# EAGLE board ABCD1110 (EAGLE 9.7.0)

Size 141.43 x 79.62 mm. Coordinates in mm from the lower left corner, seen from the top.
Outline: 0,0 141.43,0 141.43,79.62 0,79.62 0,0
Copper layers (1*16): Top 0.035mm / dielectric 1.5mm / Bottom 0.035mm
Design rules "default": minimum track width 6mil, minimum drill 0.35mm, track to track 6mil, track to pad 6mil, pad to pad 6mil, via to via 6mil, smd to smd 6mil, copper to edge 40mil, drill to drill 6mil, minimum pad ring 10mil, minimum via ring 8mil, stop-mask expansion 4mil, vias tented up to drill 0mil, thermal gap 10mil

## Footprints (pad centres in the part's own frame; a part is rotated, then mirrored left to right if it is on the bottom)
LEDRD254W60D565H860B_G = drill 0.981 pad 1.581: 1 -1.27,0; 2 1.27,0
BATTERY-GENERIC = drill 1.118 pad 3.15 octagon: + 2.54,0; - -2.54,0
RESAD1016W63L850D250B = drill 0.83 pad 1.43: 1 -5.08,0; 2 5.08,0
78B06ST = drill 0.8: 1 -6.35,-3.81; 2 -3.81,-3.81; 3 -1.27,-3.81; 4 1.27,-3.81; 5 3.81,-3.81; 6 6.35,-3.81; 7 6.35,3.81; 8 3.81,3.81; 9 1.27,3.81; 10 -1.27,3.81; 11 -3.81,3.81; 12 -6.35,3.81
DIP762W53P254L1969H508Q14B = drill 0.743 pad 1.343: 1 -3.81,7.62; 2 -3.81,5.08; 3 -3.81,2.54; 4 -3.81,0; 5 -3.81,-2.54; 6 -3.81,-5.08; 7 -3.81,-7.62; 8 3.81,-7.62; 9 3.81,-5.08; 10 3.81,-2.54; 11 3.81,0; 12 3.81,2.54; 13 3.81,5.08; 14 3.81,7.62

## Placement (x,y rotation side)
D1  GREEN  [LEDRD254W60D565H860B_G]  126.11,71.71 180 top
P1  BATTERYGENERIC  [BATTERY-GENERIC]  16.52,8.26 180 top
R1  1k  [RESAD1016W63L850D250B]  132.46,66.63 0 top
SW1  SPST-678B06ST  [78B06ST]  11.81,57.74 0 top
U1  74HC04_PDIP  [DIP762W53P254L1969H508Q14B]  35.94,57.74 90 top
U2  74HC11_PDIP  [DIP762W53P254L1969H508Q14B]  58.8,57.74 90 top
U3  74HC08_PDIP  [DIP762W53P254L1969H508Q14B]  107.06,57.74 90 top
U4  74HC32_PDIP  [DIP762W53P254L1969H508Q14B]  81.66,57.74 90 top

## Library data of the parts
D1 = Tinkercad; CATEGORY: Opto-Electronic; SUB-CATEGORY: LED; VALUE: LED_GREEN
P1 R1 SW1 U1-U4 = Tinkercad

## Nets
D1_A: D1.1 R1.1
P1+: P1.+ SW1.9 SW1.10 SW1.11 SW1.12 U1.14 U2.14 U3.14 U4.14
P1-: D1.2 P1.- U1.7 U2.7 U3.7 U4.7
U1_1A: SW1.1 U1.1 U2.3 U4.1
U1_1Y: U1.2 U2.1
U1_2A: SW1.2 U1.3 U2.2 U4.2
U1_2Y: U1.4 U2.4
U1_5A: SW1.4 U1.11 U3.2 U3.5
U1_5Y: U1.10 U2.13
U1_6A: SW1.3 U1.13 U4.5
U1_6Y: U1.12 U2.5
U2_1Y: U2.12 U4.12
U2_2Y: U2.6 U3.4
U3_2Y: U3.6 U3.9 U4.13
U3_3Y: R1.2 U3.8
U4_1Y: U4.3 U4.4
U4_2Y: U3.1 U4.6
U4_4Y: U3.10 U4.11

## Tracks (layer width: path | path; a pad name or v marks a point on that pad's centre or on a via)
D1_A  (1 unrouted)
P1+  (8 unrouted)
P1-  (5 unrouted)
U1_1A  (3 unrouted)
U1_1Y  (1 unrouted)
U1_2A  (3 unrouted)
U1_2Y  (1 unrouted)
U1_5A  (3 unrouted)
U1_5Y  (1 unrouted)
U1_6A  (2 unrouted)
U1_6Y  (1 unrouted)
U2_1Y  (1 unrouted)
U2_2Y  (1 unrouted)
U3_2Y  (2 unrouted)
U3_3Y  (1 unrouted)
U4_1Y  (1 unrouted)
U4_2Y  (1 unrouted)
U4_4Y  (1 unrouted)